# EAGLE board pled_dim_analog (EAGLE 5.10)
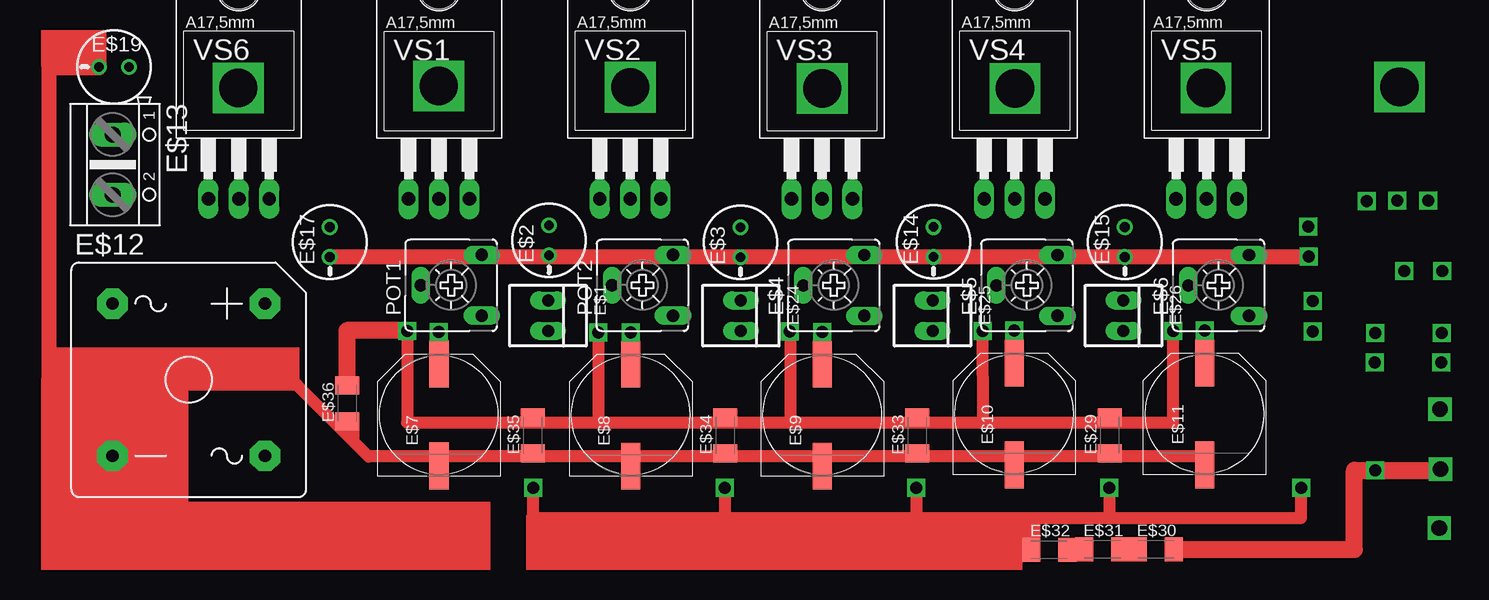
[diagram p0: board, top side]
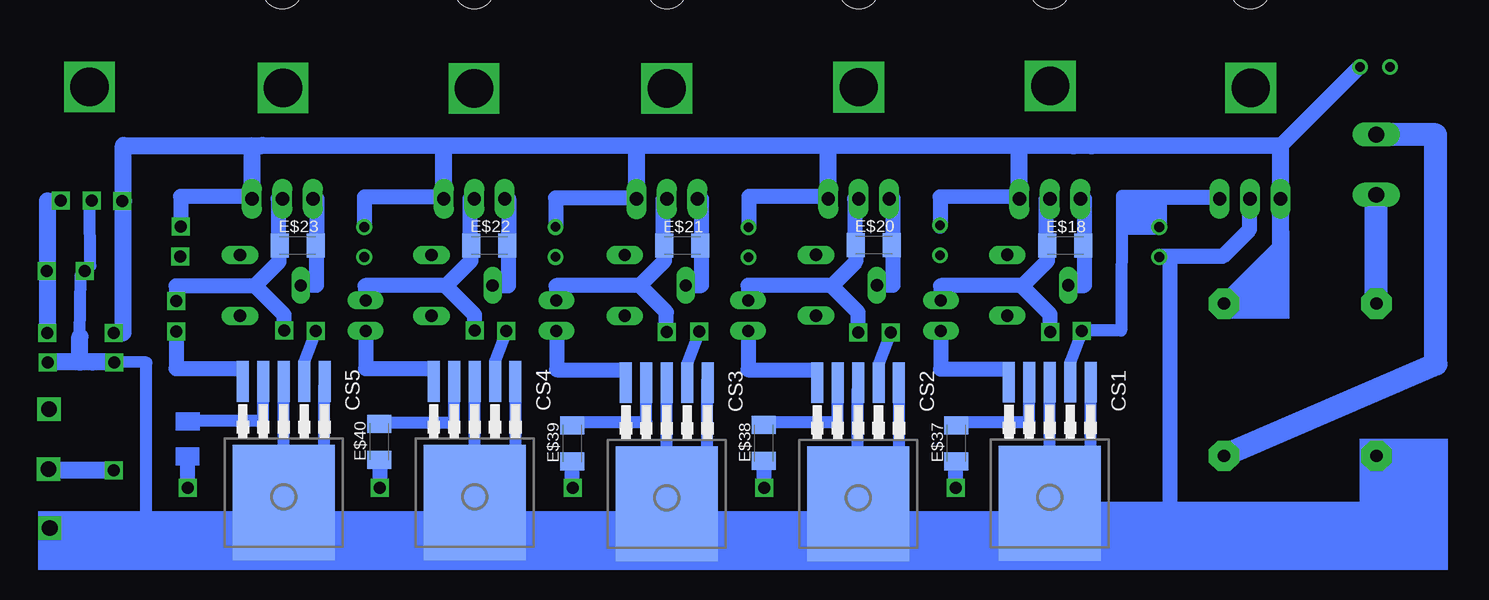
[diagram p1: board, bottom side, seen from below]

No outline drawn. Coordinates in mm, seen from the top.
Copper layers (1*16): Top 0.035mm / dielectric 1.5mm / Bottom 0.035mm
Design rules "default": minimum track width 10mil, minimum drill 24mil, track to track 8mil, track to pad 8mil, pad to pad 8mil, via to via 8mil, smd to smd 8mil, copper to edge 40mil, drill to drill 8mil, minimum pad ring 10mil, minimum via ring 8mil, stop-mask expansion 4mil, vias tented up to drill 0mil, thermal gap 10mil

## Footprints (pad centres in the part's own frame; a part is rotated, then mirrored left to right if it is on the bottom)
TO263-51 = smd 1 x 3.4: 1 -3.4,-6.6; 2 -1.7,-6.6; 3 0,-6.6; 4 1.7,-6.6; 5 3.4,-6.6 | smd 8.5 x 9.6: 6 0,3.5
22-23-2021 = drill 1 long: 1 -1.27,0; 2 1.27,0
SANYO-OSCON_D = drill 0.8 pad 1.27 round: + 1.25,0; - -1.25,0
CA6V = drill 1.016 long: A -2.54,-2.54; E 2.54,-2.54; S 0,2.54
PANASONIC_G = smd 3.9 x 1.6: + 4.25,0; - -4.25,0
GBPC8 = drill 1.016 pad 2.54 octagon: + 6.35,6.35; - -6.35,-6.35; AC1 -6.35,6.35; AC2 6.35,-6.35
AK500/2 = drill 1.321 long: 1 -2.515,0; 2 2.515,0
C1206K = smd 1.5 x 2: 1 -1.5,0; 2 1.5,0
TO220 = drill 1.118 long: 1 -2.54,-6.35; 2 0,-6.35; 3 2.54,-6.35 | hole 3.302: 0,11.176

## Placement (x,y rotation side)
CS1  MBI_1801  [TO263-51]  33.16,9.06 180 bottom
CS2  MBI_1801  [TO263-51]  49.13,9.03 180 bottom
CS3  MBI_1801  [TO263-51]  65.08,9.02 180 bottom
CS4  MBI_1801  [TO263-51]  81.09,9.12 180 bottom
CS5  MBI_1801  [TO263-51]  97,9.12 180 bottom
E$1  [22-23-2021]  42.23,21.21 270 top
E$2  [SANYO-OSCON_D]  42.31,27.5 90 top
E$3  [SANYO-OSCON_D]  58.26,27.34 90 top
E$4  [CA6V]  66.04,23.74 90 top
E$5  [CA6V]  82.14,23.74 90 top
E$6  [CA6V]  98.11,23.74 90 top
E$7  [PANASONIC_G]  33.14,12.93 90 top
E$8  [PANASONIC_G]  49.13,12.91 90 top
E$9  [PANASONIC_G]  65.09,12.91 90 top
E$10  [PANASONIC_G]  81.08,13.02 90 top
E$11  [PANASONIC_G]  96.95,13.02 90 top
E$12  [GBPC8]  12.29,15.87 0 top
E$13  [AK500/2]  5.95,33.81 270 top
E$14  [SANYO-OSCON_D]  74.35,27.36 90 top
E$15  [SANYO-OSCON_D]  90.29,27.35 90 top
E$17  [SANYO-OSCON_D]  24.04,27.35 90 top
E$18  [C1206K]  31.86,27.05 0 bottom
E$19  [SANYO-OSCON_D]  6.05,41.96 0 top
E$20  [C1206K]  47.81,27.09 0 bottom
E$21  [C1206K]  63.78,27.05 0 bottom
E$22  [C1206K]  79.86,27.08 0 bottom
E$23  [C1206K]  95.84,27.07 0 bottom
E$24  [22-23-2021]  58.3,21.21 270 top
E$25  [22-23-2021]  74.27,21.21 270 top
E$26  [22-23-2021]  90.18,21.21 270 top
E$29  [C1206K]  89.04,11.24 90 top
E$30  [C1206K]  92.88,1.71 0 top
E$31  [C1206K]  88.43,1.71 0 top
E$32  [C1206K]  83.99,1.7 0 top
E$33  [C1206K]  72.98,11.21 90 top
E$34  [C1206K]  56.98,11.23 90 top
E$35  [C1206K]  40.94,11.24 90 top
E$36  [C1206K]  25.49,13.91 90 top
E$37  [C1206K]  40.94,10.58 90 bottom
E$38  [C1206K]  56.99,10.59 90 bottom
E$39  [C1206K]  72.97,10.56 90 bottom
E$40  [C1206K]  89.05,10.7 90 bottom
POT1  5k  [CA6V]  34.16,23.75 90 top
POT2  5k  [CA6V]  50.1,23.75 90 top
VS1  LM350  [TO220]  33.15,37.29 0 top
VS2  LM350  [TO220]  49.08,37.31 0 top
VS3  LM350  [TO220]  65.06,37.29 0 top
VS4  LM350  [TO220]  81.12,37.31 0 top
VS5  LM350  [TO220]  97.11,37.31 0 top
VS6  L7805  [TO220]  16.46,37.31 0 top

## Library data of the parts
CS1-CS5 = micro-siemens
E$1 E$24-E$26 = con-molex
E$2 E$3 E$14 E$15 E$17 E$19 = rcl
E$4-E$6 POT1 POT2 = pot
E$7-E$11 E$18 E$20-E$23 E$29-E$40 = resistor
E$12 = rectifier
E$13 = con-ptr500
VS1-VS6 = ref-packages

## Nets
S$36: E$4.S

## Tracks (layer width: path | path; a pad name or v marks a point on that pad's centre or on a via)
S$1
  Bottom 1.93: 5.96,22.24 5.96,31.32
S$2
  Bottom 1.93: 18.68,9.54 0.99,17.15 1,36.31 5.96,36.33
S$3
  Bottom 1.422: 29.7,35.37 99.66,35.39 99.66,30.92
S$4
  Bottom 1.422: 83.65,30.92 83.65,35.27
S$5
  Bottom 1.422: 67.56,30.96 67.56,35.27
S$6
  Bottom 1.422: 51.63,30.92 51.63,35.27
S$7
  Bottom 1.422: 35.7,30.96 35.7,35.31
S$8  (via drill 3.2)
  other vias: 33.12,40.36
S$9  (via drill 3.2)
  other vias: 49.08,40.27
S$10  (via drill 3.2)
  other vias: 65.08,40.17
S$11  (via drill 3.2)
  other vias: 81.14,40.17
S$12  (via drill 3.2)
  other vias: 97.05,40.22 113.2,40.3
S$13
  Bottom 1.016: 49.18,7.39 49.18,15.02 | 45.72,8.01 45.72,15.64 | 61.71,8.17 61.71,15.8 | 77.68,7.61 77.68,15.24 | 93.61,7.75 93.61,15.38
S$14
  Bottom 1.422: 31.17,35.37 13.91,35.38 13.91,31.14 13.91,30.95 13.91,26.95 18.66,22.2
S$15
  Bottom 1.27: 35.65,31.13 42.3,31.12 42.3,28.65
S$16
  Bottom 1.27: 51.54,31.15 58.23,31.16 58.23,28.59
S$17
  Bottom 1.27: 67.65,31.03 74.33,31.03 74.33,28.56
S$18
  Bottom 1.27: 83.65,31.11 90.28,31.11 90.28,28.64
S$19  (via drill 1)
  other vias: 105.59,28.63
S$20  (via drill 1)
  other vias: 105.64,26.15
S$21
  Bottom 1.27: 99.83,31.15 105.58,31.15 105.58,28.68
S$22
  Bottom 1.27: 18.98,31.07 24.03,31.07 24.03,28.6
S$23
  Top 1.27: 24.04,26.15 105.66,26.16
S$24
  Bottom 1.27: 24.06,26.17 23.14,26.15 23.14,4.98
S$25
  Bottom 1.27: 16.51,30.12 16.51,28.4 18.75,26.16 23.93,26.16
S$26
  Bottom 1.27: 7.32,41.98 13.84,35.46 13.84,34.57
S$27
  Top 1.27: 6,9.42 0.65,9.42 0.65,41.89 4.79,41.89
S$28
  Bottom 1.016: 97.01,7.91 97.01,15.54
S$29
  Bottom 1.016: 81.09,7.05 81.09,14.68
S$30
  Bottom 1.016: 65.07,7.45 65.07,15.08
S$31
  Bottom 1.016: 33.18,7.87 33.18,15.5 | 29.76,7.48 29.76,15.11
S$32
  Bottom 1.27: 30.61,30.95 30.26,30.95 30.26,24.51
S$33
  Bottom 1.27: 33.14,30.93 33.48,30.93 33.48,26.74
S$34
  Bottom 1.27: 46.56,30.99 46.21,30.99 46.21,24.98 46.21,24.44 46.21,23.76 47.57,23.76
S$35
  Bottom 1.27: 49.09,30.97 49.43,30.97 49.43,26.78
S$36
  Bottom 1.27: 62.53,30.95 62.18,30.95 62.18,25.09 62.18,24.69 62.18,23.74 E$4.S
S$37
  Bottom 1.27: 65.06,30.93 65.4,30.93 65.4,26.74
S$38
  Bottom 1.27: 78.61,30.98 78.26,30.98 78.26,27.11
S$39
  Bottom 1.27: 81.14,30.96 81.48,30.96 81.48,26.77
S$40
  Bottom 1.27: 94.59,30.97 94.24,30.97 94.24,27.1
S$41
  Bottom 1.27: 97.12,30.95 97.46,30.95 97.46,26.76
S$42
  Bottom 1.27: 94.25,28.2 94.25,25.23 94.25,24.37 94.25,23.75 95.59,23.75
S$43
  Bottom 1.27: 78.25,28.23 78.25,25.06 78.25,24.53 78.25,23.72 79.62,23.72
S$44  (via drill 3.2)
  other vias: 16.41,40.22
S$45
  Bottom 1.27: 31.62,23.74 30.25,23.74 30.25,25.17
S$46
  Bottom 1.27: 33.37,26.73 33.37,25.77 35.43,23.71 42.25,23.71 42.25,22.46
S$47  (via drill 1)
  other vias: 105.97,22.44
S$48  (via drill 1)
  Bottom 1.27: v105.97,19.91 105.97,16.81 100.65,16.81
S$49
  Bottom 1.27: 49.35,27.16 49.35,25.69 51.3,23.74 51.38,23.74 | 51.38,23.74 58.29,23.74 58.29,22.43 | 49.13,19.81 49.13,21.49 51.38,23.74
S$50
  Bottom 1.27: 65.28,27.25 65.28,25.78 67.34,23.72 74.29,23.72 74.29,22.42
S$51
  Bottom 1.27: 81.4,27.06 81.4,25.78 83.46,23.72 90.21,23.72 90.21,22.42
S$52
  Bottom 1.27: 97.41,27.1 97.41,25.7 99.41,23.7 105.97,23.7 105.97,22.38
S$53
  Bottom 1.27: 90.17,19.96 90.17,16.81 84.79,16.81
S$54
  Bottom 1.27: 74.26,19.94 74.26,16.7 68.61,16.7
S$55
  Bottom 1.27: 58.29,19.91 58.29,16.7 52.7,16.7
S$56
  Bottom 1.27: 42.25,19.94 42.25,16.76 36.76,16.76
S$57  (via drill 1)
  other vias: 65.1,19.84
S$58  (via drill 1)
  other vias: 81.08,19.98
S$59  (via drill 1)
  other vias: 96.96,19.96
S$60  (via drill 1)
  other vias: 49.13,19.82
S$61  (via drill 1)
  other vias: 33.14,19.84
S$62
  Bottom 1.27: 33.13,19.82 33.13,21.33 35.52,23.72
S$63
  Bottom 1.27: 65.11,19.84 65.11,21.51 67.34,23.74
S$64
  Bottom 1.27: 81.08,19.97 81.08,21.27 83.55,23.74
S$65
  Bottom 1.27: 96.97,19.95 96.97,21.28 99.41,23.72
S$66  (via drill 1)
  other vias: 62.38,19.9
S$67  (via drill 1)
  other vias: 46.4,19.82
S$68  (via drill 1)
  other vias: 30.48,19.95
S$69  (via drill 1)
  other vias: 78.44,19.95
S$70  (via drill 1)
  other vias: 94.33,19.93
S$71
  Bottom 1.016: 94.33,19.92 95.31,17.3 | 78.42,20.03 79.4,17.41 | 62.39,19.88 63.37,17.26 | 30.47,19.98 31.45,17.36 | 46.43,19.84 47.41,17.22
S$72
  Bottom 1.016: 23.84,31.19 27.16,31.19 27.21,19.97 30.48,19.97
S$73
  Top 1.016: 30.5,19.9 30.49,12.31 46.45,12.31 46.45,12.32 | 46.45,12.32 46.45,19.97 | 46.45,12.32 62.41,12.32 | 62.41,19.96 62.41,12.32 | 62.41,12.32 78.45,12.3 | 78.43,20.05 78.45,12.3 | 78.45,12.3 94.33,12.31 94.33,19.91
S$74  (via drill 1)
  other vias: 72.93,6.85
S$75  (via drill 1)
  other vias: 89,6.85
S$76  (via drill 1)
  other vias: 104.99,6.85
S$77  (via drill 1)
  other vias: 56.97,6.85
S$78  (via drill 1)
  other vias: 40.98,6.85
S$79
  Bottom 1.27: 40.98,6.83 40.98,9.07 | 56.96,6.83 56.96,9.07 | 72.94,6.8 72.94,9.04 | 88.97,6.86 88.97,9.1 | 105.01,6.91 105.01,9.15
S$84
  Bottom 1.016: 82.8,15.1 82.8,12.29 89.06,12.29
S$85
  Bottom 1.016: 98.71,15.14 98.71,12.44 104.99,12.44
S$86
  Bottom 1.016: 66.77,14.94 66.77,12.32 72.95,12.32
S$87
  Bottom 1.016: 50.84,15.58 50.84,12.32 56.98,12.32
S$88
  Bottom 1.016: 34.86,15.57 34.86,12.32 41,12.32
S$89
  Top 1.016: 97.01,9.47 27.26,9.47 21.29,15.44 5.92,15.44 5.92,9.47
S$90
  Top 1.016: 40.96,6.88 40.96,4.37 56.96,4.37 | 56.96,6.9 56.96,4.37 | 56.96,4.37 72.93,4.37 | 72.93,6.87 72.93,4.37 | 72.93,4.37 89.03,4.37 | 89.03,4.37 89.03,6.87 | 89.03,4.37 89.03,4.34 104.99,4.34 104.99,6.9
S$91  (via drill 1)
  other vias: 110.44,30.76
S$92  (via drill 1)
  other vias: 112.98,30.8
S$93  (via drill 1)
  other vias: 115.57,30.82
S$94
  Bottom 1.422: 110.37,30.77 110.37,35.4 98.77,35.4
S$95  (via drill 1.3)
  other vias: 116.55,13.41
S$96  (via drill 1.3)
  other vias: 116.59,8.41
S$97  (via drill 1.3)
  other vias: 116.5,3.51
S$98  (via drill 1)
  Top 1.422: 94.5,1.72 109.43,1.72 109.43,8.33 v111.18,8.33 116.63,8.33
S$99
  Top 1.422: 30.53,19.96 25.46,19.96 25.46,15.48
S$100  (via drill 1)
  other vias: 116.66,17.3
S$101  (via drill 1)
  other vias: 111.13,17.31
S$102  (via drill 1)
  other vias: 111.16,19.78
S$103  (via drill 1)
  other vias: 116.69,19.77 113.57,24.93 116.76,24.93
S$104
  Bottom 1.422: 111.15,4.15 111.1,4.15
S$105
  Bottom 1.422: 111.2,19.8 110.38,19.8 110.37,30.76
S$106
  Bottom 1.016: 113.98,19.46 113.93,24.55 113.12,25.36 113.16,30.57 112.97,30.76
  Bottom 1.422: 111.11,17.35 113.98,17.35 113.98,19.46
S$107
  Bottom 1.422: 112.94,17.35 116.72,17.35
S$108
  Bottom 1.422: 116.68,19.76 116.67,30.78 115.59,30.78
S$109
  Bottom 1.016: 108.44,3.25 108.44,17.31 111.31,17.36
S$110
  Bottom 1.422: 111.16,8.33 116.59,8.33 116.59,8.35
(copper drawn outside any net)
  shapes: Bottom area x11, Top area x8